# Altium PCB ECUEXT1_23.PcbDoc
Units mm, origin at the board's own origin, x right, y up, seen from the top; angles counter-clockwise.
Board outline 56 x 45.26 mm, 2 copper layers (Top Layer, Bottom Layer); 16 components, 24 nets, 112 pads, 8 vias.
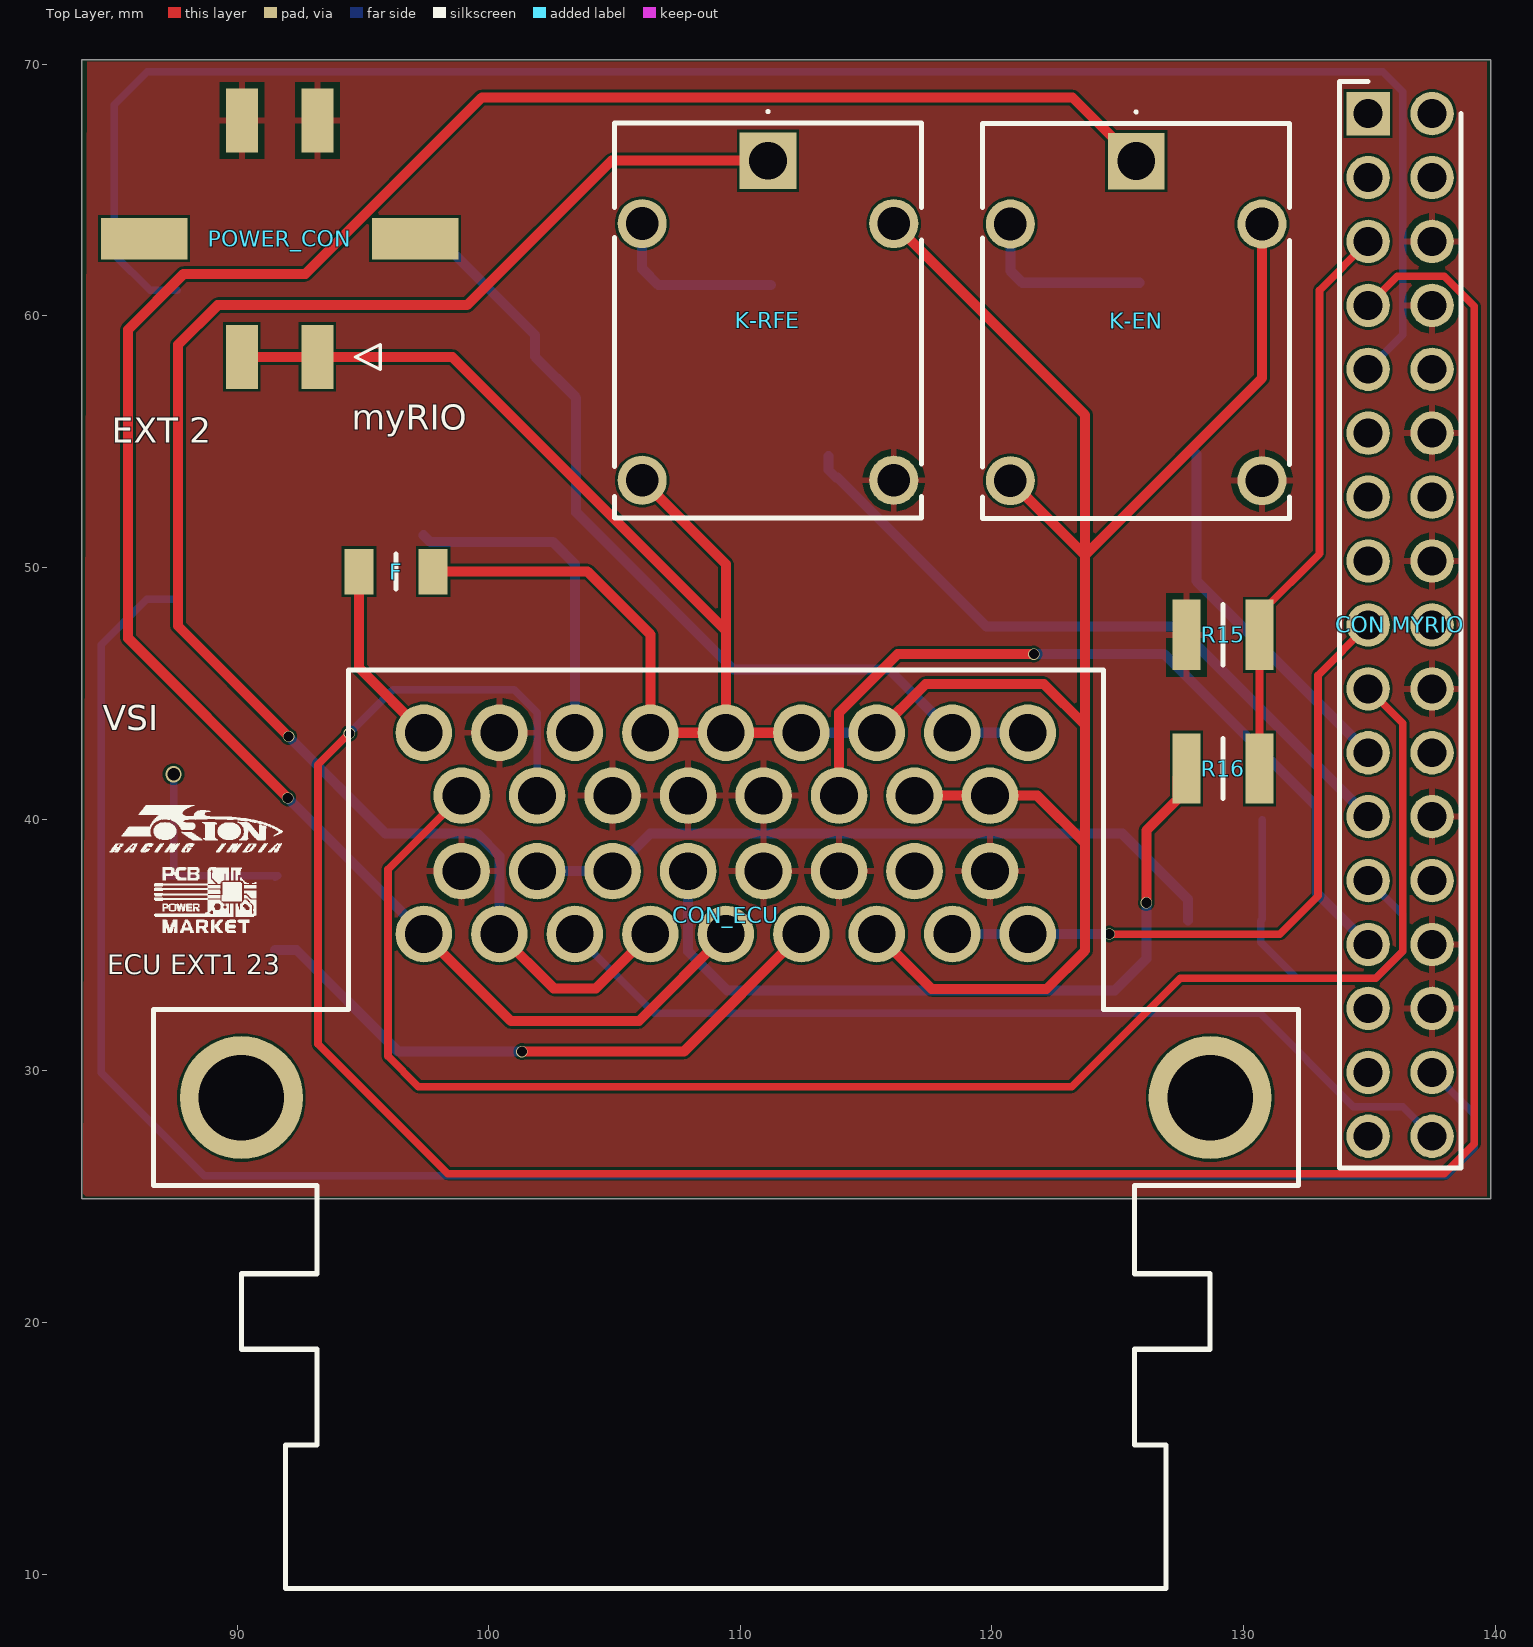
[diagram p0: Top Layer view]
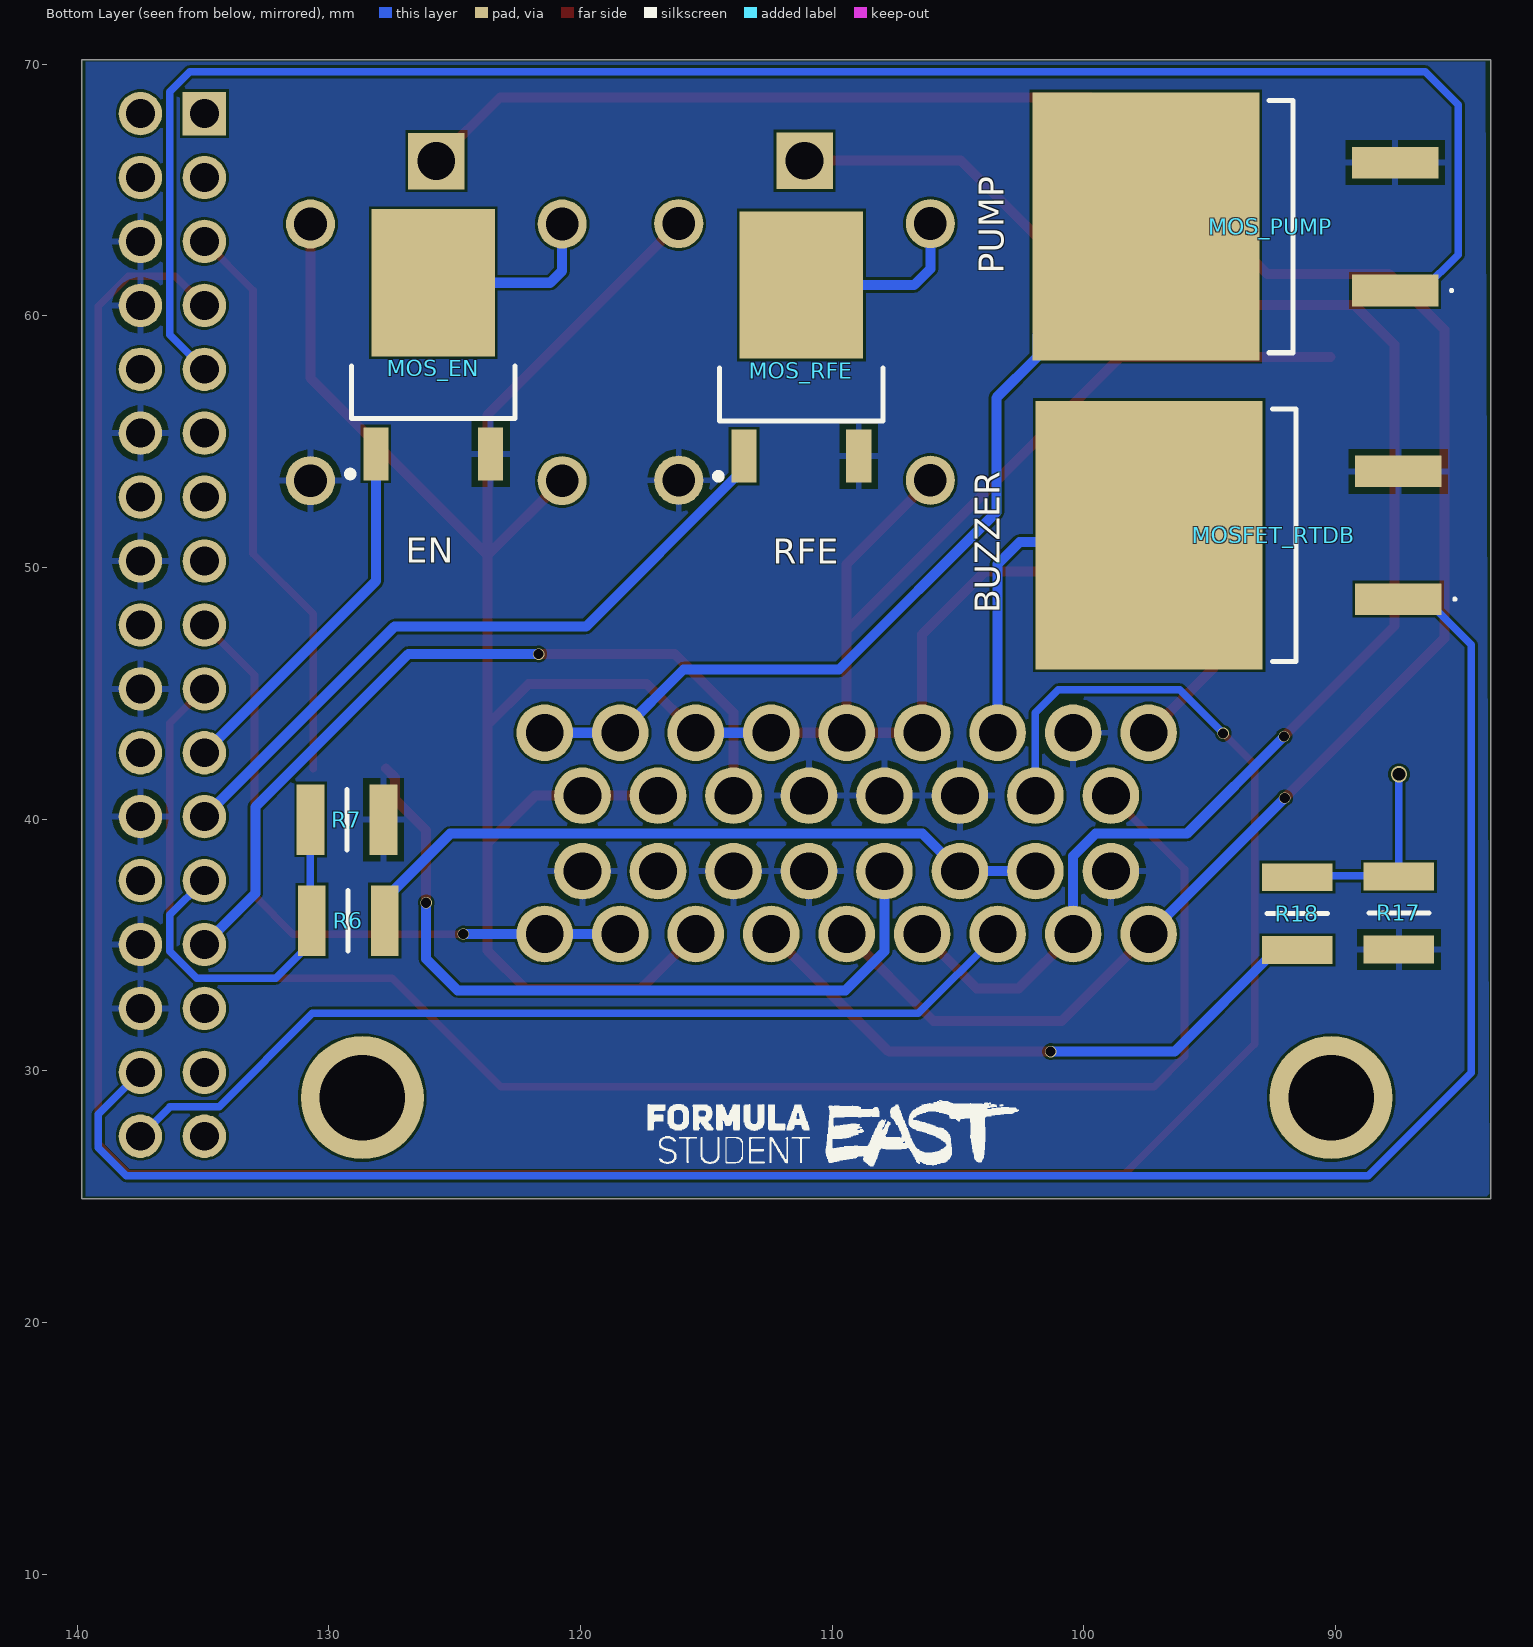
[diagram p1: Bottom Layer view, seen from below]
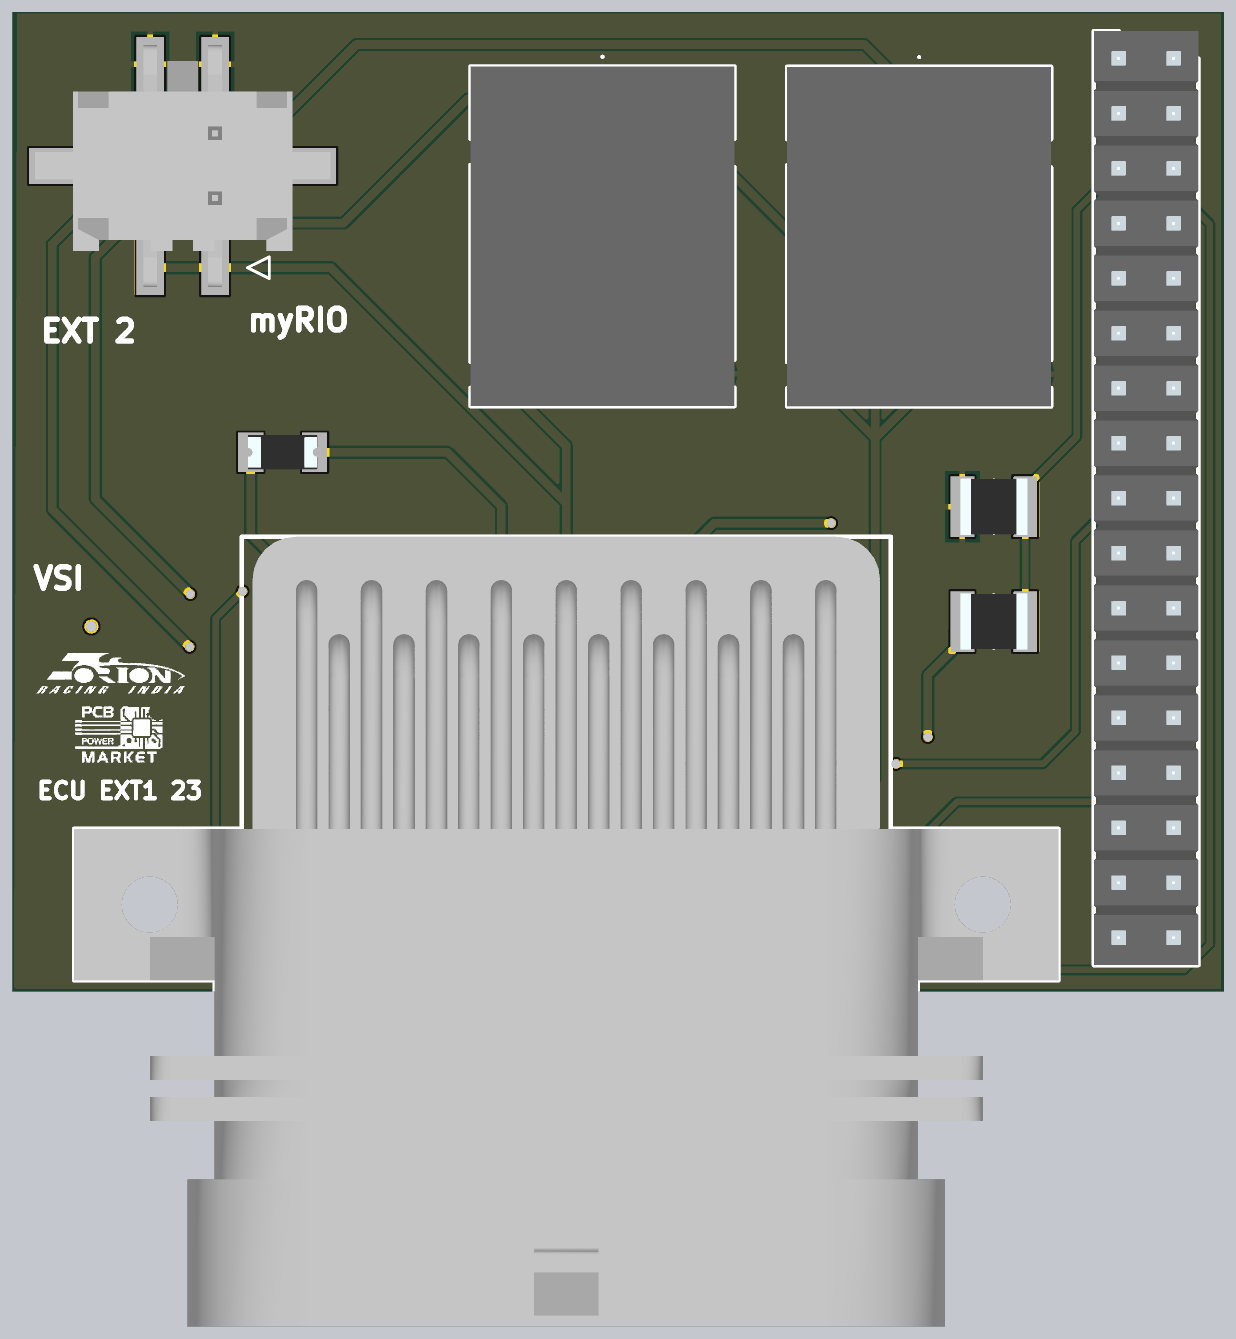
[diagram p2: 3D render of the assembled board from above, using the file's embedded part models]
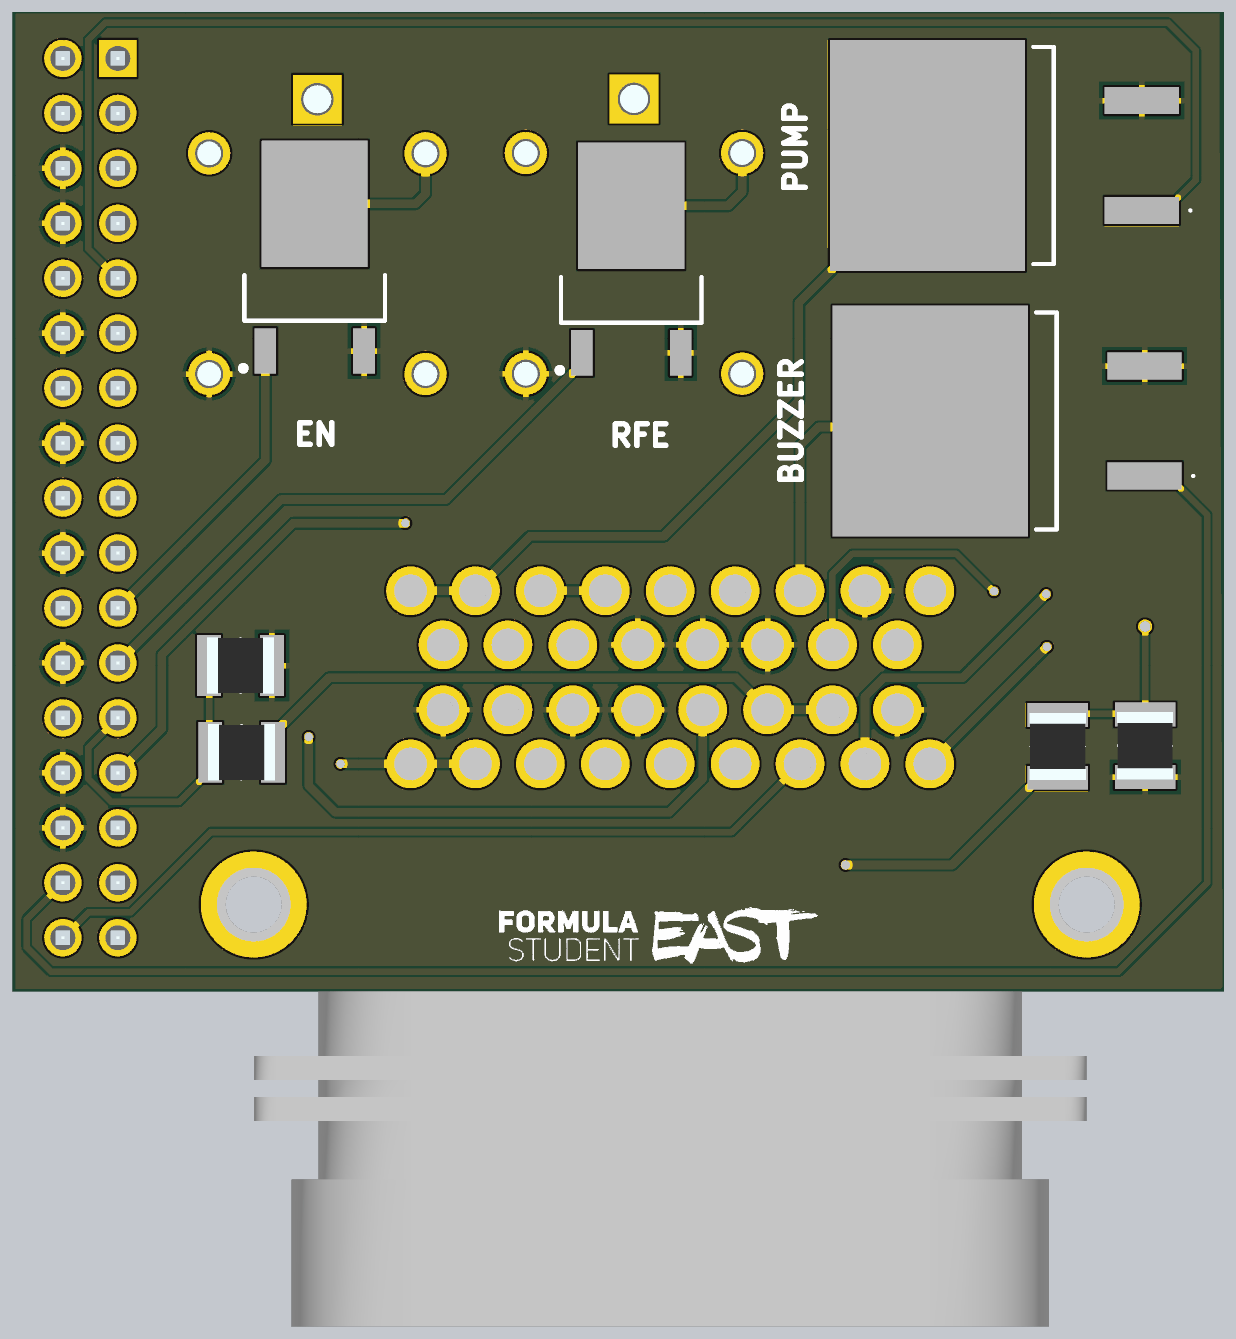
[diagram p3: 3D render of the assembled board from below, using the file's embedded part models]

## Layer stack, top to bottom
Top Solder: solder mask 0.0102, Solder Resist, Dk 3.5
Top Layer: signal copper 0.0356
Dielectric 1: dielectric 0.32, FR-4, Dk 4.8
Bottom Layer: signal copper 0.0356
Bottom Solder: solder mask 0.0102, Solder Resist, Dk 3.5

## Board outline
83.828,24.917 139.827,24.917 139.827,70.18 83.828,70.18

## Design rules (kind name [scope] priority, off if disabled: settings)
Clearance [All] p1: gap=0.1 ignorepadtopadclearanceinfootprint=FALSE
PolygonConnect [All] p1: connectstyle=Relief reliefconductorwidth=0.254 reliefentries=4 polygonreliefangle="90 Angle" airgapwidth=0.254
RoutingVias [All] p1: holewidth=0.4 width=0.45 viastyle="Through Hole" minholewidth=0.4 minwidth=0.45 maxholewidth=0.4 maxwidth=0.45
SolderMaskExpansion [All] p1: expansion=0.102 istentingtop=FALSE
Width [All] p1: maxlimit=0.5 minlimit=0.3 preferedwidth=0.4 minimp=50.000000 maximp=50.000000 favimp=50.000000
30 further rules are at their usual default settings.

## Components (designator, comment, footprint, x,y, rotation, side; value= is the part's Value field where it differs from the comment)
"CON MYRIO" "67997-234HLF" HDRV34W67P254_2X17_4318X483X858P 134.955,68.038 r270 top
CON_ECU "6437288-1" 6437288-1 109.426,45.933 r0 top
F "NANOSMDC020F-2" NANOSMDC016F2 96.319,49.835 r0 top
K-EN "SCA20-20-12VDC-C" SCA202012VDCC 125.734,66.152 r90 top
K-RFE "SCA20-20-12VDC-C" SCA202012VDCC 111.1,66.167 r90 top
MOS_EN "STD10NF10T4" TO228P972X240-3N 125.857,58.866 r90 bottom
MOS_PUMP "SUM40010EL-GE3" SUM40010ELGE3 96.266,63.551 r90 bottom
MOS_RFE "STD10NF10T4" TO228P972X240-3N 111.227,58.776 r90 bottom
MOSFET_RTDB "SUM40010EL-GE3" SUM40010ELGE3 96.139,51.283 r90 bottom
POWER_CON "43045-0419" 43045-04YY_181920 91.694,63.068 r0 top
R6 "3.3k" RESC3126X60N 129.235,35.966 r180 bottom
R7 "2.2k" RESC3126X60N 129.286,39.98 r0 bottom
R15 "RC1210JR-0710KL" RESC3126X60N 129.184,47.32 r0 top
R16 "RC1210JR-0710KL" RESC3126X60N 129.184,42.012 r180 top
R17 "RC1210JR-0710KL" RESC3126X60N 87.478,36.271 r90 bottom
R18 "RC1210JR-0710KL" RESC3126X60N 91.516,36.246 r270 bottom

## Footprints (in the part's own frame and the unit in brackets; to place one, negate y for a bottom-side part, rotate by r counter-clockwise, add the part's x,y. Pads: shape width x height; smd on the part's side, far side on the other; paste and mask are expansions set on the pad)
43045-04YY_181920 [mm]
  rect 1.27x2.54 smd: 1(1.5,-4.7) 2(-1.5,-4.7) 3(1.5,4.7) 4(-1.5,4.7)
  rect 3.43x1.65 smd: 5(5.385,0) 6(-5.385,0)
  silkscreen extent 3,-5.2 4,-4.2, body extent -6.83,-5.6 6.83,5.6, height 9.96
6437288-1 [mm]
  round 2.25 hole 1.5: 1(-12,-2.5) 2(-9,-2.5) 3(-6,-2.5) 4(-3,-2.5) 5(0,-2.5) 6(3,-2.5) 7(6,-2.5) 8(9,-2.5) 9(12,-2.5) 10(-10.5,-5) 11(-7.5,-5) 12(-4.5,-5) 13(-1.5,-5) 14(1.5,-5) 15(4.5,-5) 16(7.5,-5) 17(10.5,-5) 18(-10.5,-8) 19(-7.5,-8) 20(-4.5,-8) 21(-1.5,-8) 22(1.5,-8) 23(4.5,-8) 24(7.5,-8) 25(10.5,-8) 26(-12,-10.5) 27(-9,-10.5) 28(-6,-10.5) 29(-3,-10.5) 30(0,-10.5) 31(3,-10.5) 32(6,-10.5) 33(9,-10.5) 34(12,-10.5)
  round 4.89 hole 3.4: 35(19.25,-17) 36(-19.25,-17)
  silkscreen extent -22.75,-36.5 22.75,0, body extent -22.75,-36.5 22.75,0, height 28.16
HDRV34W67P254_2X17_4318X483X858P [mm]
  rect 1.725x1.725 hole 1.15: 1(0,0)
  round 1.725 hole 1.15: 2(0,2.54) 3(2.54,0) 4(2.54,2.54) 5(5.08,0) 6(5.08,2.54) 7(7.62,0) 8(7.62,2.54) 9(10.16,0) 10(10.16,2.54) 11(12.7,0) 12(12.7,2.54) 13(15.24,0) 14(15.24,2.54) 15(17.78,0) 16(17.78,2.54) 17(20.32,0) 18(20.32,2.54) 19(22.86,0) 20(22.86,2.54) 21(25.4,0) 22(25.4,2.54) 23(27.94,0) 24(27.94,2.54) 25(30.48,0) 26(30.48,2.54) 27(33.02,0) 28(33.02,2.54) 29(35.56,0) 30(35.56,2.54) 31(38.1,0) 32(38.1,2.54) 33(40.64,0) 34(40.64,2.54)
  silkscreen extent -1.27,-1.15 41.91,3.69, body extent -1.27,-1.14 41.91,3.68, height 8.58
NANOSMDC016F2 [mm]
  rect 1.16x1.81 smd: 1(-1.475,0) 2(1.475,0)
  silkscreen extent 0,-0.69 0,0.69, body extent -1.6,-0.79 1.6,0.79, height 0.82
RESC3126X60N [mm]
  rect 1.1x2.8 smd: 1(-1.45,0) 2(1.45,0)
  silkscreen extent 0,-1.2 0,1.2, body extent -1.55,-1.3 1.55,1.3, height 0.6
SCA202012VDCC [mm]
  rect 2.25x2.25 hole 1.5: 1(0,0)
  round 1.95 hole 1.3: 2(-2.5,5) 3(-12.7,5) 4(-12.7,-5) 5(-2.5,-5)
  silkscreen extent -14.2,-6.1 2,6.1, body extent -14.2,-6.1 1.5,6.1, height 13.8
SUM40010ELGE3 [mil]
  rect 49.49x135 smd: 1(-100,-340) 3(100,-340)
  rect 420x355 smd: 2(0,50)
  silkscreen extent -197,-430 198,-143
TO228P972X240-3N [mm]
  rect 2.1x1 smd: 1(-4.35,2.28) 3(-4.35,-2.28)
  rect 5.85x4.9 smd: 4(2.45,0)
  silkscreen extent -5.27,-3.25 -0.85,3.43

## Part data
"CON MYRIO": "Connector", Manufacturer_Name=Amphenol, Mouser Part Number=649-67997-234HLF, Arrow Part Number=67997-234HLF, Arrow Price/Stock=https://www.arrow.com/en/products/67997-234hlf/amphenol-fci?region=nac, Datasheet Link=https://cdn.amphenol-icc.com/media/wysiwyg/files/drawing/67996.pdf, Height=8.58mm, Manufacturer_Part_Number=67997-234HLF, Mouser Price/Stock=https://www.mouser.co.uk/ProductDetail/Amphenol-FCI/67997-234HLF?qs=zh4O8xspOuxBU73L6U2QCQ%3D%3D
CON_ECU: "Connector", Manufacturer_Name="TE Connectivity", Mouser Part Number=571-6437288-1, Arrow Part Number=6437288-1, Arrow Price/Stock=https://www.arrow.com/en/products/6437288-1/te-connectivity, Datasheet Link=http://www.te.com/commerce/DocumentDelivery/DDEController?Action=srchrtrv&DocNm=6437288-1&DocType=Customer+Drawing&DocLang=Japanese, Manufacturer_Part_Number=6437288-1, Mouser Price/Stock=https://www.mouser.co.uk/ProductDetail/TE-Connectivity/6437288-1?qs=WBj8811fzwGYtKR8aBSJZw%3D%3D
F: "Resettable Fuse", Manufacturer_Name=LITTELFUSE, Mouser Part Number=650-NANOSMDC020F-2, Arrow Part Number=NANOSMDC020F-2, Arrow Price/Stock=https://www.arrow.com/en/products/nanosmdc020f-2/littelfuse, Datasheet Link=https://www.littelfuse.com/~/media/electronics/datasheets/resettable_ptcs/littelfuse_ptc_nanosmdc_datasheet.pdf.pdf, Height=1mm, Manufacturer_Part_Number=NANOSMDC020F-2, Mouser Price/Stock=https://www.mouser.co.uk/ProductDetail/Littelfuse/NANOSMDC020F-2?qs=iK0evp%252BCRRU6agwMt7HYjg%3D%3D
K-EN K-RFE: "Relay or Contactor", Manufacturer_Name=LEONE, Datasheet Link=https://www.kuraelectronics.com/new-pdf/SCA%2020.pdf, Height=13.7mm, Manufacturer_Part_Number=SCA20-20-12VDC-C
MOS_EN MOS_RFE: "Integrated Circuit", Manufacturer_Name=STMicroelectronics, Mouser Part Number=511-STD10NF10, Arrow Part Number=STD10NF10T4, Arrow Price/Stock=https://www.arrow.com/en/products/std10nf10t4/stmicroelectronics, Datasheet Link=https://datasheet.datasheetarchive.com/originals/distributors/SFDatasheet-5/sf-000113456.pdf, Height=2.4mm, Manufacturer_Part_Number=STD10NF10T4, Mouser Price/Stock=https://www.mouser.co.uk/ProductDetail/STMicroelectronics/STD10NF10T4?qs=El1T93pd01%2FBh%252BX9NfIsIQ%3D%3D
MOS_PUMP MOSFET_RTDB: "MOSFET (N-Channel)", Manufacturer_Name=Vishay, Mouser Part Number=78-SUM40010EL-GE3, Arrow Part Number=SUM40010EL-GE3, Arrow Price/Stock=https://www.arrow.com/en/products/sum40010el-ge3/vishay, Datasheet Link=https://www.vishay.com/docs/66984/sum40010el.pdf, Height=5.08mm, Manufacturer_Part_Number=SUM40010EL-GE3, Mouser Price/Stock=https://www.mouser.com/Search/Refine.aspx?Keyword=78-SUM40010EL-GE3
POWER_CON: "Connector", Manufacturer_Name=Molex, Mouser Part Number=538-43045-0419, Datasheet Link=https://www.molex.com/pdm_docs/sd/430450218_sd.pdf, Height=9.91mm, Manufacturer_Part_Number=43045-0419, Mouser Price/Stock=https://www.mouser.co.uk/ProductDetail/Molex/43045-0419?qs=UeCeOHRHQebVNIQyI9VWWg%3D%3D
R6 R7: library part RC1210JR-0710KL, "Resistor", Manufacturer_Name="YAGEO (PHYCOMP)", Mouser Part Number=603-RC1210JR-0710KL, Arrow Part Number=RC1210JR-0710KL, Arrow Price/Stock=https://www.arrow.com/en/products/rc1210jr-0710kl/yageo, Datasheet Link=https://datasheet.datasheetarchive.com/originals/distributors/Datasheets_SAMA/902f9e387b938f871d31120f5fc1d65e.pdf, Height=0.6mm, Manufacturer_Part_Number=RC1210JR-0710KL, Mouser Price/Stock=https://www.mouser.co.uk/ProductDetail/YAGEO/RC1210JR-0710KL?qs=6sj9KdP9svgfoubno5Jb%252BA%3D%3D
R15 R16 R17 R18: "Resistor", Manufacturer_Name="YAGEO (PHYCOMP)", Mouser Part Number=603-RC1210JR-0710KL, Arrow Part Number=RC1210JR-0710KL, Arrow Price/Stock=https://www.arrow.com/en/products/rc1210jr-0710kl/yageo, Datasheet Link=https://datasheet.datasheetarchive.com/originals/distributors/Datasheets_SAMA/902f9e387b938f871d31120f5fc1d65e.pdf, Height=0.6mm, Manufacturer_Part_Number=RC1210JR-0710KL, Mouser Price/Stock=https://www.mouser.co.uk/ProductDetail/YAGEO/RC1210JR-0710KL?qs=6sj9KdP9svgfoubno5Jb%252BA%3D%3D

## Via types
v1: diameter 0.45, hole 0.4, Top Layer to Bottom Layer, 7 vias
v2: diameter 0.65, hole 0.5, Top Layer to Bottom Layer, 1 vias

## Nets (pads, with @x,y where several pads share a name; then routed paths per layer and width w, separated by ;. In a path a pad name is that pad's centre, name@x,y a point inside that pad or via, vN(x,y) a via of type N, cw(c..) or ccw(c..) an arc to the next point about the centre after c; other vN are vias at no path point)
+12: CON_ECU.4 CON_ECU.5 CON_ECU.6 CON_ECU.7 CON_ECU.16 CON_ECU.17 CON_ECU.32 F.2 K-EN.3 K-EN.5 K-RFE.3 K-RFE.5 POWER_CON.1 POWER_CON.2 | length 137.1
  Top Layer w0.4: POWER_CON.2 POWER_CON.1 98.553,58.368 109.426,47.495 ; F.2 103.937,49.835 106.426,47.346 CON_ECU.4 CON_ECU.5 ; K-RFE.3 109.426,50.141 109.426,47.495 ; CON_ECU.6 CON_ECU.5 ; CON_ECU.32 117.61,33.249 122.174,33.249 123.698,34.773 123.698,39.04 ; CON_ECU.7 117.357,45.364 122.072,45.364 123.698,43.739 ; K-RFE.5 123.698,56.069 123.698,50.488 ; CON_ECU.16 CON_ECU.17 121.805,40.933 123.698,39.04 ; K-EN.3 123.698,50.488 ; K-EN.5 130.734,57.524 123.698,50.488 ; CON_ECU.5 109.426,47.495 ; 123.698,39.04 123.698,43.739 ; 123.698,43.739 123.698,50.488
  Bottom Layer w0.4: CON_ECU.6 CON_ECU.7
AI2: "CON MYRIO.27" CON_ECU.15 | length 32.1
  Top Layer w0.4: CON_ECU.15 113.926,44.228 116.256,46.558 v1(121.666,46.558)
  Bottom Layer w0.4: v1(121.666,46.558) 126.848,46.558 132.918,40.488 132.918,37.055 134.955,35.018
AI3/BAMOCAR: "CON MYRIO.25" R6.1 R7.2 | length 14.9
  Bottom Layer w0.3: R7.2 130.736,36.017 R6.1 130.685,35.116 132.121,33.68 135.255,33.68 136.322,34.747 136.322,36.191 134.955,37.558
AO0/APPS: "CON MYRIO.34" CON_ECU.28 | length 37.4
  Bottom Layer w0.3: CON_ECU.28 106.576,32.283 130.658,32.283 134.366,28.575 136.318,28.575 137.495,27.398
AO1/RTD_BUZZER: "CON MYRIO.32" MOSFET_RTDB.1 | length 81.1
  Bottom Layer w0.3: MOSFET_RTDB.1 86.417,48.743 84.607,46.933 84.607,29.921 88.697,25.832 138.049,25.832 139.167,26.949 139.167,28.266 137.495,29.938
BUZZER: CON_ECU.3 MOSFET_RTDB.2 | length 13.2
  Bottom Layer w0.4: MOSFET_RTDB.2 97.686,51.006 102.563,51.006 103.426,50.142 CON_ECU.3
DIO0/RFE: "CON MYRIO.23" MOS_RFE.1 | length 27.7
  Bottom Layer w0.4: MOS_RFE.1 113.507,53.876 113.807,53.576 113.861,53.576 119.786,47.65 127.403,47.65 134.955,40.098
DIO1/EN: "CON MYRIO.21" MOS_EN.1 | length 14.7
  Bottom Layer w0.4: MOS_EN.1 128.137,49.456 134.955,42.638
DIO2/RTD_BUTTON: "CON MYRIO.19" CON_ECU.10 | length 65.6
  Top Layer w0.3: CON_ECU.10 96.001,38.008 96.001,30.573 97.212,29.362 123.165,29.362 127.483,33.68 135.261,33.68 136.322,34.741 136.322,43.811 134.955,45.178
DIO3/RTD_BRAKE: "CON MYRIO.17" CON_ECU.33 CON_ECU.34 | length 26.8
  Top Layer w0.3: v1(124.663,35.433) 131.445,35.433 132.96,36.948 132.96,45.723 134.955,47.718
  Bottom Layer w0.4: CON_ECU.33 CON_ECU.34 v1(124.663,35.433)
DIO8/PUMP_OUT: "CON MYRIO.9" MOS_PUMP.1 | length 72.7
  Bottom Layer w0.3: MOS_PUMP.1 86.544,61.011 85.128,62.427 85.128,68.389 86.436,69.698 135.534,69.698 136.322,68.91 136.322,59.245 134.955,57.878
DIO9/PUMP_CONTROL: "CON MYRIO.7" CON_ECU.11 | length 111.8
  Top Layer w0.3: v1(94.463,43.409) 93.218,42.164 93.218,31.064 98.374,25.908 137.973,25.908 139.167,27.102 139.167,60.39 137.977,61.581 136.117,61.581 134.955,60.418
  Bottom Layer w0.3: v1(94.463,43.409) 96.19,45.136 101.016,45.136 101.926,44.226 CON_ECU.11
EN: CON_ECU.26 CON_ECU.30 K-EN.1 | length 88.7
  Top Layer w0.4: v1(92.016,40.843) 85.674,47.185 85.674,59.461 87.884,61.671 92.718,61.671 99.728,68.682 123.205,68.682 K-EN.1 ; CON_ECU.26 100.88,31.979 105.972,31.979 CON_ECU.30
  Bottom Layer w0.4: v1(92.016,40.843) CON_ECU.26
GND: "CON MYRIO.6" "CON MYRIO.8" "CON MYRIO.12" "CON MYRIO.16" "CON MYRIO.20" "CON MYRIO.24" "CON MYRIO.28" "CON MYRIO.30" CON_ECU.2 CON_ECU.12 CON_ECU.13 CON_ECU.14 CON_ECU.18 CON_ECU.22 CON_ECU.23 CON_ECU.25 K-EN.4 K-RFE.4 MOS_EN.3 MOS_PUMP.3 MOS_RFE.3 MOSFET_RTDB.3 POWER_CON.3 POWER_CON.4 R7.1 R15.1 R17.1
NetK-EN_2: K-EN.2 MOS_EN.4 | length 7.2
  Bottom Layer w0.4: K-EN.2 120.734,61.791 121.209,61.316 MOS_EN.4
NetK-RFE_2: K-RFE.2 MOS_RFE.4 | length 7.2
  Bottom Layer w0.4: K-RFE.2 106.1,61.871 106.745,61.226 MOS_RFE.4
PUMP: CON_ECU.8 CON_ECU.9 MOS_PUMP.2 | length 35.4
  Bottom Layer w0.4: MOS_PUMP.2 101.845,59.242 101.845,58.379 103.48,56.744 103.48,52.197 109.728,45.949 115.91,45.949 CON_ECU.8 CON_ECU.9
PUMP_BAMOCAR: CON_ECU.19 CON_ECU.20 R6.2 | length 28.4
  Bottom Layer w0.4: CON_ECU.19 CON_ECU.20 106.414,39.421 125.181,39.421 127.785,36.816 R6.2
RFE: CON_ECU.27 CON_ECU.29 K-RFE.1 | length 65.1
  Top Layer w0.4: v1(92.05,43.282) 87.655,47.676 87.655,58.852 89.23,60.427 99.14,60.427 104.88,66.167 K-RFE.1 ; CON_ECU.27 102.585,33.274 104.267,33.274 CON_ECU.29
  Bottom Layer w0.4: v1(92.05,43.282) 95.91,39.421 99.543,39.421 100.426,38.537 CON_ECU.27
SPARE: CON_ECU.21 R16.2 | length 30.8
  Top Layer w0.4: v1(126.136,36.678) 126.136,39.548 127.384,40.796 127.384,41.662 R16.2
  Bottom Layer w0.4: CON_ECU.21 107.926,34.746 109.474,33.198 124.892,33.198 126.136,34.442 v1(126.136,36.678)
SPARE5V: "CON MYRIO.5" R15.2 R16.1 | length 22.7
  Top Layer w0.3: R16.1 R15.2 130.634,48.17 133.02,50.556 133.02,61.023 134.955,62.958
SUPPLY: CON_ECU.1 F.1 | length 7.5
  Top Layer w0.4: F.1 94.844,46.015 CON_ECU.1
VS_INV_CONNECTOR: CON_ECU.31 R18.2 | length 24.5
  Top Layer w0.4: v1(101.321,30.759) 107.752,30.759 CON_ECU.31
  Bottom Layer w0.4: R18.2 92.366,34.796 96.403,30.759 v1(101.321,30.759)
VS_INV_IN: R17.2 R18.1 | length 12.7
  Bottom Layer w0.3: R17.2@87.147,37.747 R18.1@91.618,37.747 ; R17.2@87.325,37.747 91.465,37.747 R18.1 ; R17.2 v2(87.478,41.783)
pads on no net: "CON MYRIO.1" "CON MYRIO.2" "CON MYRIO.3" "CON MYRIO.4" "CON MYRIO.10" "CON MYRIO.11" "CON MYRIO.13" "CON MYRIO.14" "CON MYRIO.15" "CON MYRIO.18" "CON MYRIO.22" "CON MYRIO.26" "CON MYRIO.29" "CON MYRIO.31" "CON MYRIO.33" CON_ECU.24 CON_ECU.35 CON_ECU.36 POWER_CON.5 POWER_CON.6

## Polygon pours and split planes (outlines as drawn)
GND on Bottom Layer "GND_L02_P000" (solid, pour order 0): 84.049,70.104 139.675,70.104 139.675,25.019 83.896,25.019
GND on Top Layer "GND_L01_P001" (solid, pour order 1): 84.049,70.104 139.675,70.104 139.675,25.019 83.896,25.019

## Silkscreen, mask and mechanical layers (free items; w line width, h text height)
Top Overlay:
  drawing of 48 lines, arcs and shapes, not listed
  text "myRIO" at 94.564,55.477 h1
  text "EXT 2" at 85.014,54.966 h1
  text "VSI" at 84.658,43.536 h1
  text "ECU EXT1 23" at 84.836,33.833 h0.76
Bottom Overlay:
  drawing of 17 lines, arcs and shapes, not listed
  text "PUMP" at 103.175,61.671 h1 r270
  text "EN" at 126.949,50.19 h1
  text "RFE" at 112.37,50.14 h1
  text "BUZZER" at 103.353,48.184 h1 r270